# Altium PCB MCU.PcbDoc
Units mil, origin at the board's own origin, x right, y up, seen from the top; angles counter-clockwise.
Board outline 1380 x 2360 mil, 2 copper layers (Top Layer, Bottom Layer); 46 components, 73 nets, 243 pads, 95 vias.
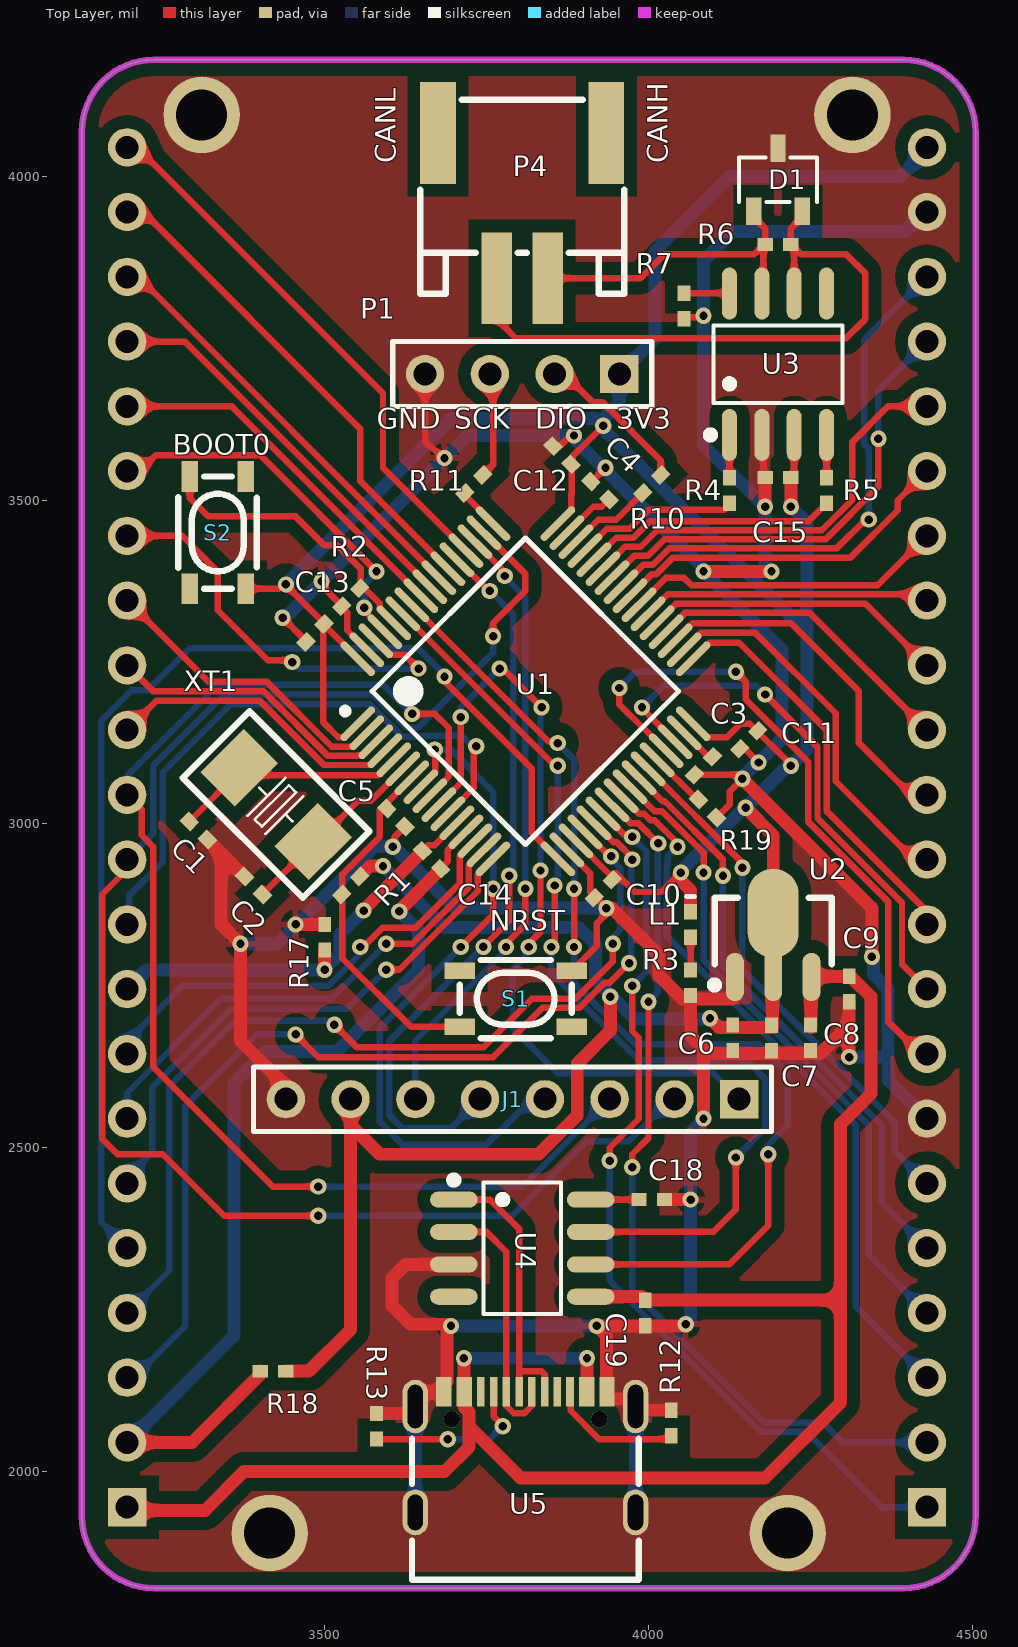
[diagram p0: Top Layer view]
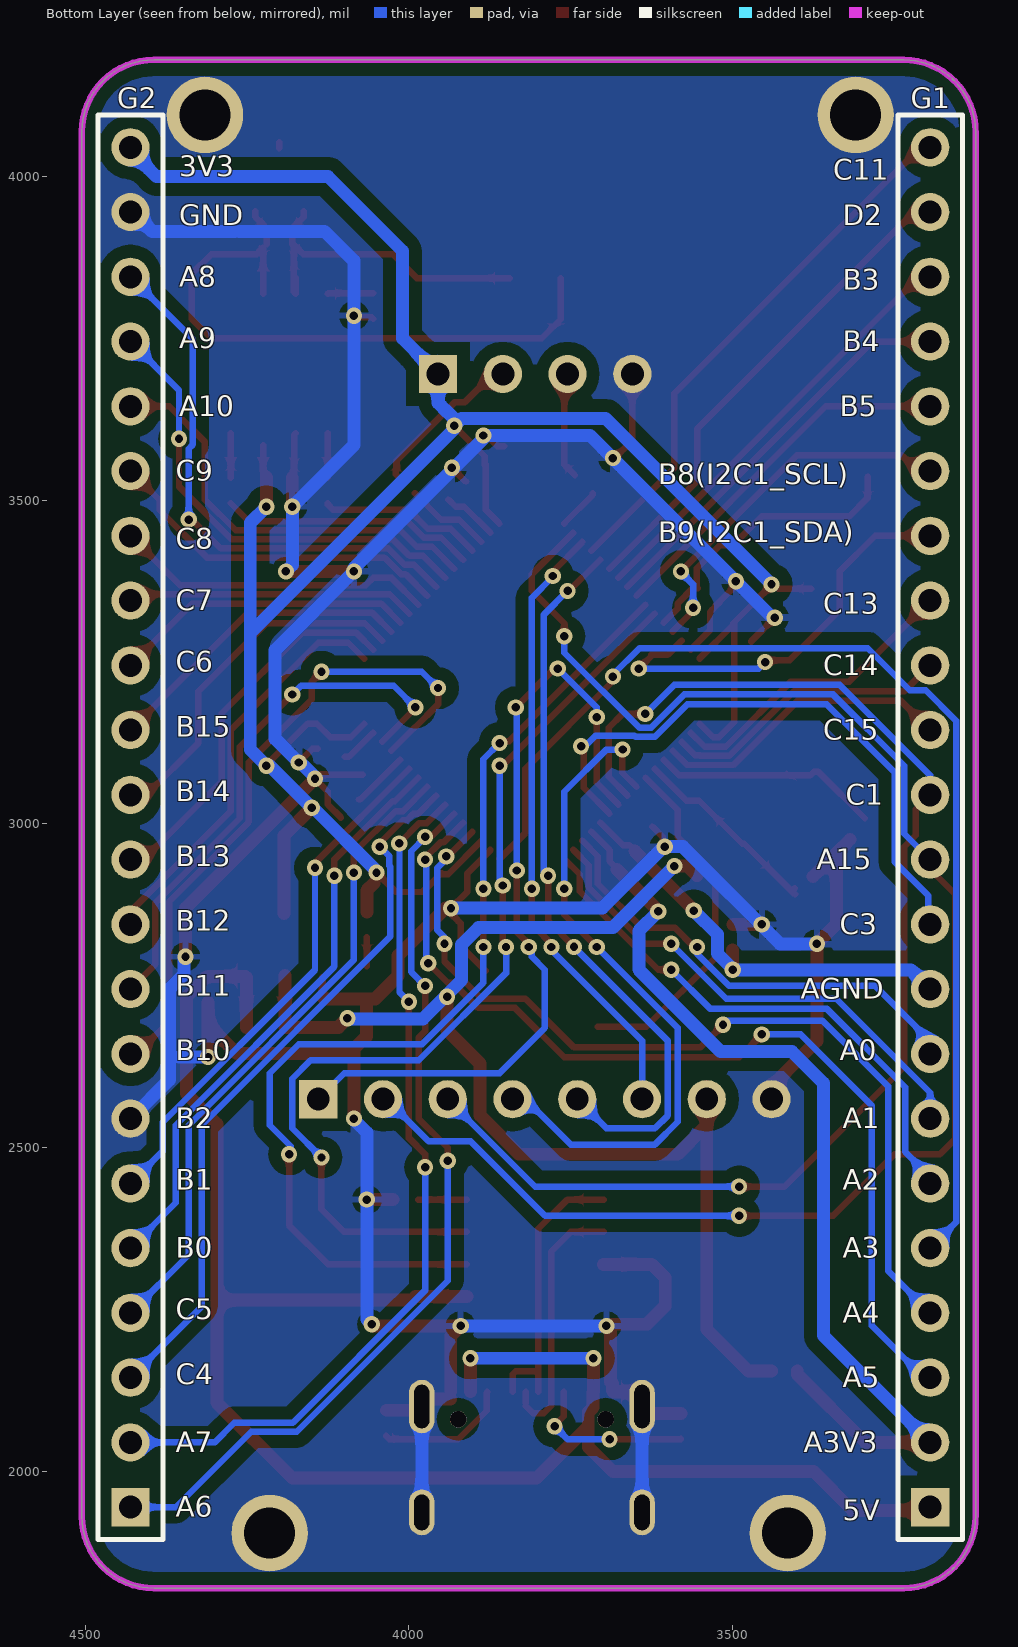
[diagram p1: Bottom Layer view, seen from below]

## Layer stack, top to bottom
Top Solder: solder mask 0.4, Solder Resist, Dk 3.5
Top Layer: signal copper 1.4
Dielectric 1: dielectric 12.6, FR-4, Dk 4.8
Bottom Layer: signal copper 1.4
Bottom Solder: solder mask 0.4, Solder Resist, Dk 3.5

## Board outline
3125,1930.83 ccw(c3235.83,1930.83) 3235.83,1820 4394.17,1820 ccw(c4394.17,1930.83) 4505,1930.83 4505,4069.17 ccw(c4394.17,4069.17) 4394.17,4180 3235.83,4180 ccw(c3235.83,4069.17) 3125,4069.17

## Design rules (kind name [scope] priority, off if disabled: settings)
Clearance [All] p1: gap=20 ignorepadtopadclearanceinfootprint=FALSE
PlaneConnect [All] p1: planeconnectstyle=Direct reliefexpansion=20 reliefentries=4 reliefconductorwidth=10 reliefairgap=10
PolygonConnect [All] p1: thpad.connectstyle=Direct thpad.reliefconductorwidth=10 thpad.reliefentries=4 thpad.polygonreliefangle="90 Angle" thpad.airgapwidth=10 smdpad.connectstyle=Direct smdpad.reliefconductorwidth=10 smdpad.reliefentries=4 smdpad.polygonreliefangle="90 Angle" smdpad.airgapwidth=10 via.connectstyle=Relief via.reliefconductorwidth=10 via.reliefentries=4 via.polygonreliefangle="90 Angle" via.airgapwidth=10
RoutingVias [All] p1: holewidth=13 width=25 viastyle="Through Hole" minholewidth=13 minwidth=25 maxholewidth=28 maxwidth=50
SolderMaskExpansion [All] p1: expansion=4
Width [All] p1: maxlimit=20 minlimit=10 preferedwidth=10 minimp=50.000000 maximp=50.000000 favimp=50.000000
29 further rules are at their usual default settings.

## Components (designator, comment, footprint, x,y, rotation, side; value= is the part's Value field where it differs from the comment)
C1 "" 0402 3305,2990 r315 top value=20pF
C2 "" 0402 3390,2905 r135 top value=20pF
C3 "" 0402 4085,3090 r45 top value=2.2μF
C4 "" 0402 3925,3515 r315 top value=2.2μF
C5 "" 0402 3610,3010 r315 top value=100nF
C6 "" 0402 4130,2670 r90 top value=10μF
C7 "" 0402 4190,2669.68 r90 top value=0.1μF
C8 "" 0402 4250,2670 r90 top value=10μF
C9 "" 0402 4310,2745 r90 top value=0.1μF
C10 "" 0402 3930,2900 r45 top value=0.1μF
C11 "" 0402 4155,3130 r45 top value=0.1μF
C12 "" 0402 3866.39,3569.69 r315 top value=0.1μF
C13 "" 0402 3485,3295 r45 top value=0.1μF
C14 "" 0402 3665,2945 r315 top value=100nF
C15 "" 0402 4200,3535 r0 top value=0.1uF
C18 "" 0402 4005,2420 r0 top value=0.1μF
C19 "" 0402 3995,2245 r270 top value=0.1μF
D1 "TPCDSOT23-SM712" SOT23-3_L2.9-W1.6-P1.90-LS2.8-BR 4200,3995 r270 top
G1 "GPIO1" HDR1X22 3195,1945 r90 bottom (schematic designator P2)
G2 "GPIO2" HDR1X22 4430,1945 r90 bottom (schematic designator P3)
J1 "LCD" HDR1X8 4140,2575 r180 top
L1 "GREEN" 0402-A 4065,2844.68 r270 top (schematic designator LED1)
P1 "SW" HDR1X4 3955,3695 r180 top
P4 "CAN1" FPC-SMD_2P-P2.00_DEALON_PH-2PWB 3805,3955 r180 top
R1 "10K" 0402 3540,2905 r45 top
R2 "10K" 0402 3540,3350 r225 top
R3 "1K" 0402 4065,2755 r90 top
R4 "0R" 0402 4125,3515 r90 top
R5 "0R" 0402 4275,3515 r90 top
R6 "120R" 0402 4200,3895 r180 top
R7 "0R" 0402 4055,3800 r270 top
R10 "22R" 0402 4005,3525 r45 top
R11 "22R" 0402 3730,3525 r45 top
R12 "5.1K" 0402 4035,2075 r270 top
R13 "5.1K" 0402 3580,2070 r270 top
R17 "0R" 0402 3500,2825 r270 top
R18 "0R" 0402 3420,2155 r180 top
R19 "100K" 0402 4091.08,3023.92 r315 top
S1 "NRST" KEY-SMD_4P-L4.2-W3.2-P2.20-LS5.1-TL#1 3795,2730 r0 top
S2 "BOOT0" KEY-SMD_4P-L4.2-W3.2-P2.20-LS5.1-TL#2 3335,3450 r270 top
U1 "STM32F405RGT6" STM-LQFP64_N 3810,3205 r45 top
U2 "AMS1117_3.3" SOT-89-3_L4.5-W2.5-P1.50-LS4.1-BL 4192.63,2812.9 r0 top
U3 "SN65HVD230DR" SN65HVD230DR-SOIC-8_L4.9-W3.9-P1.27-LS6.0-BL 4200,3710 r0 top
U4 "CH340N" CH340N-SOP-8_L4.9-W3.9-P1.27-LS6.0-BL 3805,2345 r270 top
U5 "Type-C 16Pin" USB-C-SMD_TYPE-C16PIN 3810,2030 r0 top
XT1 "8MHz" OSC-SMD_L5.0-W3.2 3425,3030 r315 top

## Footprints (in the part's own frame and the unit in brackets; to place one, negate y for a bottom-side part, rotate by r counter-clockwise, add the part's x,y. Pads: shape width x height; smd on the part's side, far side on the other; paste and mask are expansions set on the pad)
0402 [mm] "Chip Capacitor, Body 1.0x0.5mm, IPC High Density"
  rect 0.6x0.5 smd: 1(-0.5,0) 2(0.5,0)
  body extent -0.55,-0.3 0.55,0.3, height 1.3
0402-A [mm] "Chip Inductor, Body 1.0x0.5mm, IPC High Density"
  rect 0.6x0.5 smd: 1(-0.5,0) 2(0.5,0)
  silkscreen extent -1.1,-0.15 -1.1,0.15, body extent -0.55,-0.3 0.55,0.3, height 0.55
CH340N-SOP-8_L4.9-W3.9-P1.27-LS6.0-BL [mm]
  oval 0.63x1.865 smd: 1(-1.905,-2.682) 2(-0.635,-2.682) 3(0.635,-2.682) 4(1.905,-2.682) 5(1.905,2.682) 6(0.635,2.682) 7(-0.635,2.682) 8(-1.905,2.682)
  silkscreen extent -2.82,-2.83 2.58,1.52
FPC-SMD_2P-P2.00_DEALON_PH-2PWB [mm]
  rect 1.2x3.6 smd: 1(-1,2.85) 2(1,2.85)
  rect 1.4x4 smd: 3(3.3,-2.85) 4(-3.3,-2.85)
  silkscreen extent -4,-4.15 4,3.45
HDR1X4 [mm] "Connector; Header; 4 Position"
  rect 1.5x1.5 hole 0.9: 1(0,0)
  round 1.5 hole 0.9: 2(2.54,0) 3(5.08,0) 4(7.62,0)
  silkscreen extent -1.27,-1.27 8.89,1.27
HDR1X8 [mm] "Connector; Header; 8 Position"
  rect 1.5x1.5 hole 0.9: 1(0,0)
  round 1.5 hole 0.9: 2(2.54,0) 3(5.08,0) 4(7.62,0) 5(10.16,0) 6(12.7,0) 7(15.24,0) 8(17.78,0)
  silkscreen extent -1.27,-1.27 19.05,1.27
HDR1X22 [mm] "Connector; Header; 22 Position"
  rect 1.5x1.5 hole 0.9: 1(0,0)
  round 1.5 hole 0.9: 2(2.54,0) 3(5.08,0) 4(7.62,0) 5(10.16,0) 6(12.7,0) 7(15.24,0) 8(17.78,0) 9(20.32,0) 10(22.86,0) 11(25.4,0) 12(27.94,0) 13(30.48,0) 14(33.02,0) 15(35.56,0) 16(38.1,0) 17(40.64,0) 18(43.18,0) 19(45.72,0) 20(48.26,0) 21(50.8,0) 22(53.34,0)
  silkscreen extent -1.27,-1.27 54.61,1.27
KEY-SMD_4P-L4.2-W3.2-P2.20-LS5.1-TL#1 [mm]
  rect 1.2x0.65 smd: 1(-2.2,1.1) 2(2.2,1.1) 3(-2.2,-1.1) 4(2.2,-1.1)
  silkscreen extent -2.2,-1.55 2.2,1.52
KEY-SMD_4P-L4.2-W3.2-P2.20-LS5.1-TL#2 [mm]
  rect 1.2x0.65 smd: 1(-2.2,-1.1) 2(2.2,1.1) 3(-2.2,1.1) 4(2.2,-1.1)
  silkscreen extent -2.2,-1.55 2.2,1.52
OSC-SMD_L5.0-W3.2 [mm]
  rect 1.9x2.4 smd: 1(-2.05,0) 2(2.05,0)
  silkscreen extent -3.32,-1.85 3.33,1.85
SN65HVD230DR-SOIC-8_L4.9-W3.9-P1.27-LS6.0-BL [mm]
  oval 0.588x2.045 smd: 1(-1.905,-2.773) 2(-0.635,-2.773) 3(0.635,-2.773) 4(1.905,-2.773) 5(1.905,2.773) 6(0.635,2.773) 7(-0.635,2.773) 8(-1.905,2.773)
  silkscreen extent -2.8,-2.92 2.53,1.52
SOT23-3_L2.9-W1.6-P1.90-LS2.8-BR [mm]
  rect 1.07x0.6 smd: 1(1.235,-0.95) 2(1.235,0.95) 3(-1.235,0)
  silkscreen extent -0.88,-1.54 0.88,1.54
SOT-89-3_L4.5-W2.5-P1.50-LS4.1-BL [mm]
  oval 0.7x1.9 smd: 1(-1.501,-1.25) 3(1.501,-1.25)
  oval 0.7x2.1 smd: 2(0,-1.151)
  oval 2x3.5 smd: 2(0,1.25)
  silkscreen extent -2.46,-1.71 2.3,1.85
STM-LQFP64_N [mm] "Thin QFP, 64-Leads, Body 10x10mm, Pitch 0.5mm, IPC Medium Density"
  oval 1.8x0.3 smd: 1(-5.55,3.75) 2(-5.55,3.25) 3(-5.55,2.75) 4(-5.55,2.25) 5(-5.55,1.75) 6(-5.55,1.25) 7(-5.55,0.75) 8(-5.55,0.25) 9(-5.55,-0.25) 10(-5.55,-0.75) 11(-5.55,-1.25) 12(-5.55,-1.75) 13(-5.55,-2.25) 14(-5.55,-2.75) 15(-5.55,-3.25) 16(-5.55,-3.75) 33(5.55,-3.75) 34(5.55,-3.25) 35(5.55,-2.75) 36(5.55,-2.25) 37(5.55,-1.75) 38(5.55,-1.25) 39(5.55,-0.75) 40(5.55,-0.25) 41(5.55,0.25) 42(5.55,0.75) 43(5.55,1.25) 44(5.55,1.75) 45(5.55,2.25) 46(5.55,2.75) 47(5.55,3.25) 48(5.55,3.75)
  oval 0.3x1.8 smd: 17(-3.75,-5.55) 18(-3.25,-5.55) 19(-2.75,-5.55) 20(-2.25,-5.55) 21(-1.75,-5.55) 22(-1.25,-5.55) 23(-0.75,-5.55) 24(-0.25,-5.55) 25(0.25,-5.55) 26(0.75,-5.55) 27(1.25,-5.55) 28(1.75,-5.55) 29(2.25,-5.55) 30(2.75,-5.55) 31(3.25,-5.55) 32(3.75,-5.55) 49(3.75,5.55) 50(3.25,5.55) 51(2.75,5.55) 52(2.25,5.55) 53(1.75,5.55) 54(1.25,5.55) 55(0.75,5.55) 56(0.25,5.55) 57(-0.25,5.55) 58(-0.75,5.55) 59(-1.25,5.55) 60(-1.75,5.55) 61(-2.25,5.55) 62(-2.75,5.55) 63(-3.25,5.55) 64(-3.75,5.55)
  silkscreen extent -5.67,-4.25 4.25,4.57, body extent -5,-5 5,5, height 1.6
USB-C-SMD_TYPE-C16PIN [mm]
  oval 1x2.1 hole 0.6 slot 1.7 at 90 deg: 1(-4.32,1.787) 2(4.32,1.787)
  oval 1x1.8 hole 0.6 slot 1.4 at 90 deg: 3(-4.32,-2.362) 4(4.32,-2.362)
  rect 0.6x1.15 smd: A1B12(-3.2,2.362) A4B9(-2.4,2.362) B1A12(3.2,2.362) B4A9(2.4,2.362)
  rect 0.3x1.15 smd: A5(-1.25,2.362) A6(-0.25,2.362) A7(0.25,2.362) A8(-1.75,2.362) B5(1.75,2.362) B6(0.75,2.362) B7(-0.75,2.362) B8(1.25,2.362)
  round 0.65 hole 0.65 unplated: ""(-2.89,1.288) ""(2.89,1.288)
  silkscreen extent -4.45,-5 4.45,0.52

## Part data
C1 C2 C3 C4 C5 C6 C7 C8 C9 C10 C11 C12 C13 C14 C15 C18 C19: library part "Cap Semi", "Capacitor (Semiconductor SIM Model)", LatestRevisionDate=29-May-2009, LatestRevisionNote="IPC-7351 Footprint Added.", PackageDescription="Chip Capacitor", PackageReference=C1206, Published=8-Jun-2000, Publisher="Altium Limited"
D1: BOM_JLCPCB Part Class="Extended Part", BOM_Manufacturer="TECH PUBLIC", BOM_Manufacturer Part=TPCDSOT23-SM712, BOM_Supplier=LCSC, BOM_Supplier Part=C558433, Contributor=LCSC, spicePre=D, spiceSymbolName=TPCDSOT23-SM712
G1 G2: library part "Header 22", "Header, 22-Pin", LatestRevisionDate=17-Jul-2002, LatestRevisionNote="Re-released for DXP Platform.", Publisher="Altium Limited"
J1: library part "Header 8", "Header, 8-Pin", LatestRevisionDate=17-Jul-2002, LatestRevisionNote="Re-released for DXP Platform.", Publisher="Altium Limited"
L1: library part LED2, "Typical RED, GREEN, YELLOW, AMBER GaAs LED", LatestRevisionDate=17-Jul-2002, LatestRevisionNote="Re-released for DXP Platform.", PackageDescription="SM LED; 2 Flat Leads", PackageReference=3.2X1.6X1.1, PackageVersion=Feb-2002, Published=8-Jun-2000, Publisher="Altium Limited"
P1: library part "Header 4", "Header, 4-Pin", LatestRevisionDate=17-Jul-2002, LatestRevisionNote="Re-released for DXP Platform.", Publisher="Altium Limited"
P4: library part "Header 2", "Header, 2-Pin", LatestRevisionDate=17-Jul-2002, LatestRevisionNote="Re-released for DXP Platform.", Publisher="Altium Limited"
R1 R2 R3 R4 R5 R6 R7 R10 R11 R12 R13 R17 R18 R19: library part Res2, "Resistor", LatestRevisionDate=17-Jul-2002, LatestRevisionNote="Re-released for DXP Platform.", PackageDescription="Axial Device, Thru-Hole; 2 Leads; 0.4 in Pin Spacing", PackageReference=AXIAL-0.4, Published=8-Jun-2000, Publisher="Altium Limited"
S1 S2: library part SW-PB, "Switch", LatestRevisionDate=17-Jul-2002, LatestRevisionNote="Re-released for DXP Platform.", PackageDescription="Switch; 2 Leads", PackageReference=SPST-2, Published=24-Mar-1999, Publisher="Altium Limited"
U1: "ARM Cortex-M4 32-bit MCU+FPU, 210 DMIPS, 1024 kB Flash, 192 kB Internal RAM, 51 I/Os, 64-pin LQFP, -40 to 85 degC, Tray", I/Os (High Current)=51, Manufacturer=STMicroelectronics, Operating Frequency(F) (Processor speed) (MHz)=168, Supplier Part Number 1=497-11767-ND, Supply Voltage(Vcc) max (V)=3.6, Supply Voltage(Vcc) min (V)=1.8, ComponentLink1Description="Manufacturer URL", ComponentLink1URL=http://www.st.com/web/en/home.html, ComponentLink2Description=Datasheet, ComponentLink2URL=http://www.st.com/st-web-ui/static/active/en/resource/technical/document/datasheet/DM00037051.pdf, ComponentLink3Description="Package Specification", ComponentLink3URL=http://www.st.com/st-web-ui/static/active/en/resource/technical/document/datasheet/DM00037051.pdf, Core="ARM Cortex-M4", D/A Converter=2x12-bit, DatasheetVersion="Rev. 4", FLASH Size (Prog) (kB)=1024, Internal RAM Size (kB)=192, Mounting Technology="Surface Mount", PackageDescription="64-Pin Low Profile Quad Flat Package, 10 x 10 mm Body, 0.5 mm Pitch", PackageReference=LQFP64, PackageVersion="Rev. 4, 06/2013", Packing=Tray, PartNumber=STM32F405RGT6, Supplier 1=Digi-Key, Supplier 2=Farnell, Supplier 3=Newark, Supplier 4=Mouser, Supplier Part Number 2=2064363, Supplier Part Number 3=73T2329, Supplier Part Number 4=511-STM32F405RGT6
U2: library part "AMS1117_3.3 SOT-89"
XT1: library part XTAL, "Crystal Oscillator", LatestRevisionDate=17-Jul-2002, LatestRevisionNote="Re-released for DXP Platform.", PackageDescription="Crystal, Thru-Hole; 2 Leads; Body 3.1 x 8.2 mm (Dia.xH)", PackageReference=R38, Published=8-Jun-2000, Publisher="Altium Limited"

## Free pads (board coordinates)
  round 118.11 hole 78.74: 6(3415,1905) 7(4215,1905) 8(4315,4095) 9(3310,4095)

## Via types
v1: diameter 25, hole 13, Top Layer to Bottom Layer, 95 vias

## Nets (pads, with @x,y where several pads share a name; then routed paths per layer and width w, separated by ;. In a path a pad name is that pad's centre, name@x,y a point inside that pad or via, vN(x,y) a via of type N, cw(c..) or ccw(c..) an arc to the next point about the centre after c; other vN are vias at no path point)
3.3V: C6.2 C7.2 C10.2 C11.2 C12.2 C13.2 C15.2 G2.22 J1.7 L1.1 P1.1 R1.2 R18.1 S2.2 U1.1 U1.19 U1.32 U1.48 U1.64 U2.2 U3.3 | length 5820.2
  Top Layer w10: S2.2 3429.33,3363.39 ; v1(3440,3370) 3440,3368.92 3498.92,3310 C13.2 ; U1.1 3530.22,3134.01 3520.99,3134.01 3497.53,3157.47 3497.53,3307.53 C13.2 ; U1.64 3551.1,3255.6 3498.92,3307.78 C13.2 ; R1.2@3555.08,2920 R1.2@3555.08,2920.08 ; U1.48 3880.99,3484.78 3880.99,3509.01 3881.39,3509.41 3881.39,3555.77 3882.78,3554.38 3882.78,3567.78 3893.5,3578.5 3893.91,3578.5 3930,3614.59 v1(3930,3615) ; U1.19 3939.36,2922.53 3947.53,2922.53 3948.92,2923.92 3950,2923.92 3978.92,2895 4020,2895 v1(4050,2925) ; U1.32 4089.78,3134.01 4121.22,3134.01 4142.21,3155 4156.42,3155 4220,3091.42 v1(4220,3090) ; U2.2@4191.31,2766.29 U2.2@4192.63,2767.6 ; v1@4219.84,3490.16 v1(4220,3490) ; C15.2@4219.84,3534.84 C15.2 4225,3535 U3.3@4225,3585
  Top Layer w20: R18.1 3475.48,2155 3540,2219.52 J1.7 ; J1.7@3535,2580 J1.7 ; J1.7@3540,2595 J1.7 ; 3545,2530 3585,2490 3830,2490 3890,2550 3890,2630 3941,2681 v1(3941,2733.34) ; R1.2@3555.08,2920.08 3570,2935 v1(3590,2935) ; 4053.5,2909.02 4065,2897.52 L1.1 ; v1(4095,2700) 4109,2686 4191.31,2686 U2.2@4191.31,2766.29 ; v1(4150,3025) 4192.63,2982.37 U2.2@4192.63,2862.1 ; v1@4219.84,3490.16 C15.2@4219.84,3534.84
  Bottom Layer w10: v1@4215,3090 v1(4220,3090)
  Bottom Layer w20: v1(3440,3370) 3696.5,3626.5 3918.5,3626.5 v1(3930,3615) ; v1(3590,2935) 3685,2840 3892.48,2840 3918.5,2813.98 3918.5,2759.02 3978.52,2699 4094,2699 v1(4095,2700) ; 3949.56,3645.44 3940.88,3636.75 ; v1@4053.5,2930.98 4146.57,3024.04 4149.04,3024.04 v1(4150,3025) v1@4215,3090 ; v1(4220,3090) 4245,3115 4245,3295 ; v1(4220,3490) 4245,3465 4245,3295 ; G2.22@4430,4040 4390,4000 4125,4000 4010,3885 4010,3750 P1.1 3955,3650 3941.31,3636.31 3940.88,3636.75 ; v1(3930,3615) 3930,3625.88 3940.88,3636.75 ; v1(3930,3615) 3930,3610 4245,3295
+5: C8.2 C9.2 C19.1 G1.1 U2.3 U4.5 U5.A4B9 U5.B4A9 | length 2826.2
  Top Layer w10: v1(3715,2175) v1@3715.26,2174.74 ; U5.A4B9@3715.26,2123.27 U5.A4B9 ; U5.B4A9 U5.B4A9@3904.74,2123.27 ; v1@3904.74,2174.74 v1(3905,2175) ; C19.1@3989.69,2270 C19.1 ; C8.2@4250,2684.69 C8.2@4250.86,2685.55 ; U2.3@4250.86,2762.84 U2.3 U2.3@4252.71,2764.69 ; C9.2@4310,2762.72 C9.2
  Top Layer w20: G1.1@3195,1940 3315,1940 3375,2000 3685,2000 3723.01,2038.02 3723.01,2069.61 ; U5.A4B9@3715.26,2123.27 v1@3715.26,2174.74 ; U5.A4B9 3715.51,2099.31 3723.01,2091.81 3723.01,2069.61 ; U5.B4A9@3904.74,2123.27 v1@3904.74,2174.74 ; U4.5 C19.1@3989.69,2270 ; C19.1 4296.5,2264.68 ; C8.2@4250.86,2685.55 U2.3@4250.86,2762.84 ; U2.3@4252.71,2764.69 C9.2 ; C9.2@4310,2762.72 4314.05,2762.72 4343.5,2733.27 4343.5,2583.5 4296.5,2536.5 4296.5,2264.68 ; 3723.01,2069.61 3802.63,1990 4180,1990 4296.5,2106.5 4296.5,2264.68
  Bottom Layer w20: v1(3715,2175) v1(3905,2175)
A3.3V: C14.2 G1.2 R18.2 U1.13 | length 1502.5
  Top Layer w10: v1(3615,2865) v1@3615,2866.08 ; C14.2@3678.92,2930 C14.2 3690,2942.16 3690,2959.73 U1.13
  Top Layer w20: G1.2 3295,2045 3400.31,2150.31 R18.2 ; v1@3615,2866.08 C14.2@3678.92,2930
  Bottom Layer w20: G1.2 3360,2210 3360,2600 3408.5,2648.5 3518.5,2648.5 3645,2775 3645,2835 v1(3615,2865)
ADC1_IN0: G1.8 U1.14 | length 715.9
  Top Layer w10: v1(3555,2810) 3559.59,2810 3589.59,2840 3640.41,2840 3708.23,2907.83 3708.23,2950.12 U1.14
  Bottom Layer w10: G1.8 3195,2665 3280,2750 3505.41,2750 3555,2799.59 v1(3555,2810)
ADC1_IN1: G1.7 U1.15 | length 766.4
  Top Layer w10: v1(3595,2815) 3635.2,2815 3722.28,2902.08 3722.28,2936.33 U1.15
  Bottom Layer w10: G1.7 3195,2585 3340,2730 3510,2730 v1(3595,2815)
ADC1_IN2: G1.6 U1.16 | length 852.2
  Top Layer w10: v1(3595,2775) 3615,2775 3736.28,2896.28 3736.28,2922.49 U1.16
  Bottom Layer w10: G1.6 3195,2455 3233.53,2493.53 3233.53,2593.53 3355,2715 3535,2715 v1(3595,2775)
AGND: C14.1 G1.9 R17.2 U1.12 | length 665.4
  Top Layer w10: v1(3499.8,2774.8) v1@3500,2775 ; v1(3560,2866.26) v1@3560,2867.05 ; C14.1@3651.08,2958.13 C14.1 3659.69,2967.53 3669.96,2967.53 U1.12
  Top Layer w20: v1@3500,2775 R17.2 ; v1@3560,2867.05 C14.1@3651.08,2958.13
  Bottom Layer w20: G1.9 3224.8,2774.8 v1(3499.8,2774.8) 3499.8,2776.15 3523.5,2799.85 3523.5,2829.76 v1(3560,2866.26)
BLK: J1.1 U1.10 | length 1247.5
  Top Layer w10: U1.10 3676.37,3030.11 3710,3063.73 v1(3710,3165) ; v1(3770,3240) 3775,3240 v1(3835,3180) ; v1@3810,2810 3833.25,2833.25 v1(3833.25,2928.25)
  Bottom Layer w10: v1(3710,3165) 3710,3180 v1(3770,3240) ; v1@3810,2810 3810,2795 3790,2775 3790,2685 3860,2615 4100,2615 J1.1 ; v1(3833.25,2928.25) v1@3833.25,3180
  other v1: 3815,2810
CAN1_RX: R5.1 U1.44 | length 395.3
  Top Layer w10: U1.44 3916.28,3408.22 3950.05,3442 3976.8,3442 4002.3,3467.5 4247.18,3467.5 R5.1
CAN1_TX: R4.1 U1.45 | length 254.6
  Top Layer w10: U1.45 3935.73,3456 3971,3456 4000,3485 4116.65,3485 4125,3493.35 R4.1
CAN_H: D1.1 P4.1 R6.2 U3.7 | length 519.1
  Top Layer w10: P4.1 3987.63,3842.8 4024.84,3880 4163.35,3880 4178.35,3895 R6.2 ; D1.1 4162.6,3937.13 4169.41,3930.32 4169.84,3930.32 4180.31,3919.84 R6.2 ; U3.7@4175,3843.7 U3.7 4177.52,3821.67 4177.52,3892.2 R6.2
CAN_L: D1.2 P4.2 R6.1 U3.6 | length 983.7
  Top Layer w10: P4.2 3765.63,3779.37 3795,3750 4305,3750 4335,3780 4335,3850 4305,3880 4235.16,3880 4225,3890.16 U3.6 ; R6.1 4219.69,3919.68 4237.4,3937.4 D1.2
CS: G1.11 J1.2 U1.50 | length 2510
  Top Layer w10: G1.11 3210,2945 3156.47,2891.47 3156.47,2513.53 3180,2490 3250,2490 3345,2395 v1(3490,2395) ; U1.50 3810,3385.95 3810,3360 3760,3310 v1(3760,3290)
  Bottom Layer w10: G1.11 3235,2985 3235,3090 3345,3200 3574.59,3200 3626.09,3148.5 3643.91,3148.5 3760,3264.59 v1(3760,3290) ; v1(3490,2395) 3789.8,2395 3904.8,2510 3969.59,2510 4034.59,2575 J1.2
DC: G1.12 J1.3 U1.9 | length 2003.1
  Top Layer w10: G1.12 3217.5,3022.5 3217.5,2982.5 3235,2965 3235,2625 3420,2440 v1(3490,2440) ; v1(3635,3170) 3670,3170 3691.5,3148.5 3691.5,3073.07 3662.45,3044.02 U1.9
  Bottom Layer w10: G1.12 3195,3075 3335,3215 3590,3215 v1(3635,3170) ; v1(3490,2440) 3805,2440 J1.3
GND: C1.2 C2.2 C3.1 C4.1 C5.2 C6.1 C7.1 C8.1 C9.1 C10.1 C11.1 C12.1 C13.1 C15.1 C18.2 C19.2 D1.3 G2.7 G2.21 J1.8 P1.4 pad.6 pad.7 pad.8 pad.9 R2.2 R3.1 R7.2 R12.1 R13.1 R17.1 R19.2 S1.2 U1.18 U1.63 U2.1 U3.2 U4.3 U5.1 U5.2 U5.3 U5.4 U5.A1B12 U5.B1A12 | length 7758.5
  Top Layer w10: v1(3435,3318.58) 3471.08,3282.5 C13.1 ; v1(3455,2845) v1@3455.16,2844.84 ; v1(3495,3375) 3491.42,3375 3490,3373.58 3491.79,3371.79 R2.2@3526.08,3337.5 ; R17.1@3499.84,2844.84 R17.1 ; R2.2@3521.08,3341.08 R2.2 ; R2.2@3521.79,3341.79 R2.2@3526.08,3337.5 ; R2.2@3530,3332.16 R2.2 ; R2.2@3531.08,3331.08 3535,3327.16 3535,3299.05 U1.63 ; v1(3605,2965) 3607.87,2967.87 3607.87,2980.03 C5.2 ; U5.1@3629.24,2089.68 U5.1 3639.92,2109.44 U5.1@3653.49,2123.01 ; P1.4 3655,3590 v1(3685,3565) ; U5.A1B12 U5.A1B12@3684.67,2123.66 ; v1@3691.15,2227.5 v1@3695,2223.65 ; C12.1 3863.27,3583.61 3879.66,3600 v1(3885,3600) ; U1.18 3874.03,2959.53 3910,2923.56 3910,2895 v1@3928.21,2876.79 ; S1.2 3920,2811.69 3920,2846.42 v1@3943.58,2870 ; C4.1 3912.5,3528.92 v1(3933.58,3550) ; U5.B1A12@3935.33,2123.66 U5.B1A12 U5.B1A12@3935.98,2112.18 ; U5.2@3968.27,2112.18 U5.2 U5.2@3985.77,2094.68 ; R7.2 4057.34,3782.66 4082.66,3782.66 v1(4085,3785) ; C3.1 4138.92,3076.08 v1(4145,3070) 4125.28,3050.28 4125.28,3030.28 R19.2 ; U2.1@4133.53,2733.53 U2.1 ; C11.1 4148.92,3116.08 v1(4170,3095) ; U3.2@4175,3603.5 4177.37,3601.13 4177.37,3537.95 C15.1 C15.1@4180.16,3534.84 ; v1(4180,3490) v1@4180.16,3490.16 ; D1.3 D1.3@4200,4052.88 ; R2.2 R2.2@3526.08,3337.5
  Top Layer w20: C1.2 3340,2955 ; C2.2 3340,2955 ; J1.8@3440,2595 3370,2665 v1(3370,2815) 3340,2845 3340,2955 ; v1@3455.16,2844.84 R17.1@3499.84,2844.84 ; R13.1 U5.1@3629.24,2089.68 ; U5.1@3653.49,2123.01 U5.A1B12 ; U5.A1B12@3684.67,2123.66 3685.82,2124.82 3685.82,2135.65 3688.5,2138.32 3688.5,2217.15 v1@3695,2223.65 ; v1@3691.15,2227.5 3632.5,2227.5 3604.14,2255.86 3604.14,2299.14 3625,2320 U4.3 ; U5.B1A12@3935.33,2123.66 3935.33,2209.67 v1(3920,2225) 4055,2225 v1(4057.5,2227.5) ; U5.B1A12@3935.98,2112.18 U5.2@3968.27,2112.18 ; v1@3943.58,2870 4016.5,2797.08 4016.5,2765.47 4051.97,2730 R3.1@4065.16,2730 ; U5.2@3985.77,2094.68 R12.1 ; C18.2 v1(4065,2420) ; v1(4085,2545) 4085,2645.32 4085,2652.52 ; v1(4085,3390) v1(4190,3390) ; U2.1@4133.53,2733.53 4130,2730 R3.1@4065.16,2730 ; v1(4145,3070) 4345,2870 v1(4345,2795) ; v1@4180.16,3490.16 C15.1@4180.16,3534.84 ; v1(4310,2640) 4310,2690 ; C9.1 4310,2690 ; R3.1@4065.16,2730 4065.16,2697.65 4065.5,2697.31 4065.5,2672.02 4085,2652.52 ; 4085,2652.52 4092.21,2645.32 4265.31,2645.32 4310,2690
  Bottom Layer w10: v1(3695,2225) v1@3705,2225 ; U5.2@3980.08,2097.29 U5.2 ; v1@4162.5,3090 4167.5,3095 v1(4170,3095) ; 4262.5,3915 4268.75,3915 ; v1(4345,2795) v1@4347.5,2792.5 ; G2.21@4421.29,3940 G2.21@4430,3940
  Bottom Layer w20: v1(3370,2815) 3426.99,2815 3576.99,2965 v1(3605,2965) 3606.42,2965 3700.92,2870.5 3934.5,2870.5 v1(3935,2870) ; v1(3435,3318.58) 3438.58,3318.58 v1(3495,3375) v1(3685,3565) 3720,3600 v1(3885,3600) 3885,3595 4085,3395 v1(4085,3390) 4206.5,3268.5 4206.5,3131.5 v1(4170,3095) ; U5.3 U5.1 ; v1@3705,2225 v1(3920,2225) ; U5.4 U5.2 ; v1(4057.5,2227.5) 4065,2235 v1(4065,2420) 4065,2523.65 4085,2543.65 v1(4085,2545) ; v1@4143.75,3071.25 v1@4162.5,3090 ; v1(4190,3390) 4180,3400 v1(4180,3490) 4085,3585 v1(4085,3785) 4085,3870 4130,3915 4262.5,3915 ; 4268.75,3915 4396.29,3915 G2.21@4421.29,3940 ; v1@4317.5,2640 4355,2640 ; v1@4347.5,2792.5 4347.5,2767.5 4370,2745 4370,2605 G2.7
GPIO_2: G1.15 U1.2 | length 472.6
  Top Layer w10: G1.15 3320,3220 3410,3220 3510.89,3119.11 3543.15,3119.11 U1.2
GPIO_3: G1.14 U1.3 | length 451
  Top Layer w10: G1.14 3234.69,3205.31 3404.89,3205.31 3505.1,3105.11 3550.23,3105.11 3550.95,3105.83 3557.71,3105.83 U1.3
GPIO_4: G1.13 U1.4 | length 466.6
  Top Layer w10: G1.13 3240,3190 3400,3190 3498.89,3091.11 3570.34,3091.11 3592.37,3113.13 U1.4
GPIO_11: G1.10 U1.11 | length 944.3
  Top Layer w10: U1.11 3690.29,3016.19 3730,3055.89 3730,3124 v1(3734,3120)
  Bottom Layer w10: G1.10 3197.89,2847.89 3197.89,2889.53 3250,2941.64 3250,3080 3355,3185 3569.8,3185 3620.3,3134.5 3649.7,3134.5 3651.7,3136.5 3711.5,3136.5 3728,3120 v1(3734,3120)
GPIO_17: G1.5 U1.17 | length 1781.3
  Top Layer w10: v1(3685,3227.7) 3685,3220.41 3820,3085.41 3820,2986.21 U1.17
  Bottom Layer w10: G1.5 3155,2385 3155,3159.49 3201.99,3206.47 3226.47,3206.47 3291.5,3271.5 3643.91,3271.5 3685,3230.41 v1(3685,3227.7)
GPIO_20: G1.4 U1.20 | length 1405.3
  Top Layer w10: v1(3515,2690) 3550,2655 3745,2655 3820,2730 3887.45,2730 3945,2787.55 v1(3945,2815) ; U1.20 3939.73,2950 v1(3942.29,2950)
  Bottom Layer w10: G1.4 3260,2310 3260,2595 3361.5,2696.5 3508.5,2696.5 v1(3515,2690) ; v1(3942.29,2950) 3942.29,2945.94 3956.5,2931.74 3956.5,2836.5 3945,2825 v1(3945,2815)
GPIO_21: G1.3 U1.21 | length 1514.6
  Top Layer w10: v1(3455,2675) 3490,2640 3760,2640 3836,2716 3893.25,2716 3919.5,2742.25 3932.09,2754.84 3939.84,2754.84 v1(3970,2785) ; U1.21 3916.28,3001.78 3946.55,2971.5 3951.2,2971.5 3975,2947.7 v1(3975,2945)
  Bottom Layer w10: G1.3 3205,2145 3285,2225 3285,2565 3395,2675 v1(3455,2675) ; v1(3970,2785) 3973.12,2788.12 3973.12,2943.12 v1(3975,2945)
GPIO_22: G2.1 U1.22 | length 1420.8
  Top Layer w10: U1.22 3930.2,3015.7 3963.02,2982.87 3972.13,2982.87 v1(3975,2980) ; v1(3940,2480) 3940,2500 3985,2545 3985,2670 3975,2680 v1(3975,2750)
  Bottom Layer w10: v1(3940,2480) 3940,2294.8 4173.3,2061.5 4243.5,2061.5 4360,1945 G2.1 ; v1(3975,2750) 3996.5,2771.5 3996.5,2958.09 3975,2979.59 v1(3975,2980)
GPIO_23: G2.2 U1.23 | length 1355.5
  Top Layer w10: U1.23 3944.12,3029.62 3972.23,3001.5 3983.91,3001.5 4015,2970.41 v1(4015,2970) ; v1(3975,2470) 3975,2490 4000,2515 v1(4000,2725.5)
  Bottom Layer w10: v1(3975,2470) 3975,2279.59 4179.09,2075.5 4269.5,2075.5 4300,2045 G2.2 ; v1(4000,2725.5) 4014.5,2740 4014.5,2969.5 v1(4015,2970)
GPIO_24: G2.3 U1.24 | length 1155.4
  Top Layer w10: U1.24 3958.04,3043.53 3986.07,3015.5 3993.62,3015.5 4003.12,3006 4009.41,3006 4042.13,2973.28 4042.13,2967.87 v1(4045,2965)
  Bottom Layer w10: v1(4045,2965) 4030,2950 4030,2935.41 4028.5,2933.91 4028.5,2826.5 4320,2535 4320,2255 G2.3 ; G2.3@4405,2145 G2.3 ; G2.3@4420,2135 G2.3
GPIO_25: G2.4 U1.25 | length 1009.1
  Top Layer w10: U1.25 4008.92,3020 4020.41,3020 4085,2955.41 v1(4085,2925)
  Bottom Layer w10: v1(4085,2925) 4085,2790 4340,2535 4340,2335 G2.4
GPIO_26: G2.5 U1.26 | length 912.6
  Top Layer w10: U1.26 4021.76,3035 4025.2,3035 4115,2945.2 v1(4115,2920)
  Bottom Layer w10: v1(4115,2920) 4115,2780 4360,2535 4360,2415 G2.5
GPIO_27: G2.6 U1.27 | length 818.8
  Top Layer w10: U1.27 3999.51,3085.29 4145,2939.8 v1(4145,2932.4)
  Bottom Layer w10: v1(4145,2932.4) 4145,2774.59 4380,2539.59 4380,2495 G2.6
GPIO_29: G2.8 U1.29 | length 1035.6
  Top Layer w10: v1(3955,3210) 3955,3184.59 3991.09,3148.5 3991.77,3148.5 U1.29 ; v1(4135,3235) 4150,3220 4150,3192.27 4247,3095.27 4247,3003.2 4370,2880.2 4370,2695 4420,2645 G2.8
  Bottom Layer w10: v1(3955,3210) 3980,3235 v1(4135,3235)
GPIO_30: G2.9 U1.30 | length 842.1
  Top Layer w10: v1(3990,3180) 3990,3178.6 4041.06,3127.54 U1.30 ; v1(4180,3200) 4261,3119 4261,3009 4391.47,2878.53 4391.47,2783.53 G2.9
  Bottom Layer w10: v1(3990,3180) 4023.5,3213.5 4166.5,3213.5 v1(4180,3200)
GPIO_33: G2.10 U1.33 | length 636.5
  Top Layer w10: U1.33 4093.79,3280 4140,3280 4275,3145 4275,3020 4430,2865 G2.10
GPIO_37: G2.14 U1.37 | length 468.2
  Top Layer w10: U1.37 4042.44,3340 4335,3340 G2.14
GPIO_38: G2.15 U1.38 | length 447.8
  Top Layer w10: U1.38 4029.6,3355 4060.2,3355 4060.7,3354.5 4359.3,3354.5 4359.8,3355 4420,3355 G2.15
GPIO_39: G2.16 U1.39 | length 498.2
  Top Layer w10: U1.39 4026.76,3380 4055,3380 4066.5,3368.5 4353.5,3368.5 G2.16
GPIO_40: G2.17 U1.40 | length 547.3
  Top Layer w10: U1.40 3971.96,3352.55 4005.41,3386 4012.3,3386 4037.8,3411.5 4311.91,3411.5 4384.76,3484.35 4384.76,3499.76 G2.17
GPIO_52: G1.22 U1.52 | length 848.3
  Top Layer w10: G1.22 3210,4045 3590,3665 3590,3550.27 U1.52
GPIO_54: G1.21 U1.54 | length 770.5
  Top Layer w10: G1.21 3220,3945 3555,3610 3555,3529.6 U1.54
I2C1_SCL: G1.17 U1.61 | length 583.4
  Top Layer w10: G1.17 3215,3545 3239.24,3569.24 3400.76,3569.24 v1(3580,3390) ; v1(3561.13,3333.87) 3564,3331 3564,3326.22 3592.86,3297.36 U1.61
  Bottom Layer w10: v1(3561.13,3333.87) 3561.13,3369.98 3580,3388.86 v1(3580,3390)
I2C1_SDA: G1.16 U1.62 | length 656.1
  Top Layer w10: G1.16 3280,3445 3335,3390 3335,3330 3412.13,3252.87 3447.13,3252.87 v1(3450,3250) ; U1.62 3600.8,3261.08 3626.08,3261.08 3625,3260 v1(3645,3240)
  Bottom Layer w10: v1(3450,3250) 3460,3240 v1(3645,3240)
NetC1_1: C1.1 U1.5 XT1.1 | length 353.1
  Top Layer w10: C1.1@3296.08,3008.92 3368.2,3081.04 3373.96,3081.04 3380,3075 3582.56,3075 U1.5
NetC2_1: C2.1 U1.6 XT1.2 | length 299.3
  Top Layer w10: C2.1@3403.74,2891.26 3482.12,2969.64 3485.36,2969.64 3551.71,3036 3571.4,3036 U1.6 ; C2.1@3403.92,2901.08 C2.1@3405.31,2899.69
NetC3_2: C3.2 U1.31 | length 59.6
  Top Layer w10: U1.31 4054.98,3140.49 4055.95,3140.49 4092.52,3103.92 C3.2
NetC4_2: C4.2 U1.47 | length 86.1
  Top Layer w10: U1.47 3874.52,3449.98 3914.54,3490 3927.84,3490 C4.2
NetC5_1: C5.1 R1.1 S1.3 U1.7 | length 548.2
  Top Layer w10: U1.7 3585,3021.76 3585,2980 3527.16,2922.16 3527.16,2792.84 3633.3,2686.7 S1.3
NetC18_1: C18.1 U4.8 | length 74.7
  Top Layer w10: U4.8 C18.1
NetLED1_2: L1.2 R3.2 | length 45
  Top Layer w10: R3.2@4065,2780 4065,2790 L1.2
NetP1_2: P1.2 R10.2 | length 257.9
  Top Layer w10: P1.2@3855,3710 P1.2 3870,3695 3913.5,3651.5 3928.91,3651.5 4018.92,3561.49 4018.92,3548.55 4020.31,3547.16 4020.31,3540.31 R10.2
NetP1_3: P1.3 R11.2 | length 184.8
  Top Layer w10: R11.2 3760,3555 3760,3690 P1.3 P1.3@3755,3710 ; P1.3@3760,3705 P1.3@3760,3710
NetR2_1: R2.1 S2.1 U1.60 | length 452.5
  Top Layer w10: S2.1 3291.7,3503.3 3320,3475 3455,3475 3499.83,3430.17 3519.83,3430.17 3555.31,3394.69 3555.31,3365.17 R2.1@3554.42,3364.28 ; R2.1@3553.92,3363.78 R2.1@3554.42,3364.28 ; U1.60 3584.91,3332.65 3584.91,3340.49 3561.13,3364.28 R2.1@3554.42,3364.28
NetR4_2: R4.2 U3.1 | length 68.8
  Top Layer w10: R4.2 U3.1@4125,3603.5
NetR5_2: R5.2 U3.4 | length 68.8
  Top Layer w10: R5.2 U3.4@4275,3603.5
NetR7_1: R7.1 U3.8 | length 70.2
  Top Layer w10: R7.1 4124.47,3819.68 U3.8
NetR12_2: R12.2 U5.B5 | length 205.3
  Top Layer w10: U5.B5 3879.8,2122.11 3879.8,2093.87 3923.63,2050.04 4030.16,2050.04 4035,2054.88 R12.2
NetR13_2: R13.2 U5.A5 | length 262.3
  Top Layer w10: R13.2 3580.32,2050 v1(3690,2050) ; U5.A5 3760.78,2085.37 3775,2071.16 v1(3775,2070)
  Bottom Layer w10: v1(3690,2050) 3755,2050 v1(3775,2070)
NetR19_1: R19.1 U1.28 | length 89.4
  Top Layer w10: U1.28 4013.71,3099.21 4075.09,3037.84 R19.1
RES: J1.4 U1.8 | length 1073
  Top Layer w10: U1.8 3670.4,3079.32 3670.4,3114.6 v1(3670,3115) ; v1(3710,2810) 3760,2860 v1(3760,2900)
  Bottom Layer w10: v1(3670,3115) 3695,3115 3760,3050 v1(3760,2900) ; v1(3710,2810) 3585,2685 3585,2540 3620,2505 3750,2505 J1.4@3840,2595
SPI1_MISO: G1.19 U1.56 | length 624.2
  Top Layer w10: G1.19 3283.92,3745 U1.56
SPI1_MOSI: G1.18 U1.57 | length 574.7
  Top Layer w10: G1.18 3356.08,3645 U1.57
SPI1_SCK: G1.20 U1.55 | length 673.8
  Top Layer w10: G1.20 3204.39,3835.61 3221.14,3835.61 U1.55
SPI3_MOSI: J1.5 U1.53 | length 1142.1
  Top Layer w10: U1.53 3704.7,3408.22 3752.93,3360 v1(3755,3360) ; v1(3745,2810.2) 3745,2810.41 3785,2850.41 v1(3785,2920)
  Bottom Layer w10: J1.5 3695,2530 3620,2530 3600,2550 3600,2665 3745,2810 v1(3745,2810.2) ; v1(3755,3360) 3791.5,3323.5 3791.5,2926.5 v1(3785,2920)
SPI3_SCK: J1.6 U1.51 | length 963.8
  Top Layer w10: U1.51 3732.05,3435.57 3777.97,3389.65 v1(3777.97,3382.97) ; v1@3775,2810 3810,2845 v1(3810,2900)
  Bottom Layer w10: J1.6 3640,2665.41 3775,2800.41 v1@3775,2810 ; v1(3777.97,3382.97) 3777.97,3381.63 3810,3349.59 v1(3810,2900)
  other v1: 3780,2810
SWCLK: R11.1 U1.49 | length 65.3
  Top Layer w10: R11.1 3716.08,3508.2 3759.89,3464.39 U1.49
SWDIO: R10.1 U1.46 | length 134.2
  Top Layer w10: U1.46 3888.44,3436.06 3922.38,3470 3950,3470 R10.1
TIM1_CH1: G2.20 U1.41 | length 843
  Top Layer w10: U1.41 3958.04,3366.47 3991.57,3400 4006.5,3400 4032,3425.5 4290.5,3425.5 4335,3470 v1(4340,3470)
  Bottom Layer w10: v1(4340,3470) 4340,3579.59 4333.5,3586.09 4333.5,3748.5 G2.20
TIM1_CH1N: G2.11 U1.34 | length 592.3
  Top Layer w10: U1.34 4080.95,3295 4165,3295 4289,3171 4289,3066 4410,2945 G2.11
TIM1_CH2: G2.19 U1.42 | length 724.6
  Top Layer w10: U1.42 3944.12,3380.38 3977.73,3414 3999,3414 4024.5,3439.5 4273.37,3439.5 4355,3521.13 v1(4355,3595)
  Bottom Layer w10: v1(4355,3595) 4355,3670 G2.19
TIM1_CH2N: G2.12 U1.35 | length 556.8
  Top Layer w10: U1.35 4068.11,3310 4220,3310 4325,3205 4325,3125 4405,3045 G2.12
TIM1_CH3: G2.18 U1.43 | length 656.3
  Top Layer w10: U1.43 3930.2,3394.3 3963.89,3428 3988,3428 4013.5,3453.5 4267.57,3453.5 4315,3500.93 4315,3590 4370,3645 G2.18
TIM1_CH3N: G2.13 U1.36 | length 489.9
  Top Layer w10: U1.36 4056.27,3326 4249,3326 G2.13
USART1_RX: U1.59 U4.7 | length 1517.7
  Top Layer w10: U1.59 3855.4,3090 v1(3860,3090) ; v1(3850,2810) 3855,2815 v1(3855,2905) ; U4.7 4100,2370 4135,2405 v1(4135,2485)
  Bottom Layer w10: v1(3850,2810) 3850,2769.8 3984.8,2635 4151.78,2635 4180,2606.78 4180,2530 v1(4135,2485) ; v1(3855,2905) 3860,2910 v1(3860,3090)
USART1_TX: U1.58 U4.6 | length 1627.7
  Top Layer w10: U1.58 3845.37,3127.87 3857.13,3127.87 v1(3860,3125) ; v1(3885,2810) v1(3885,2900) ; U4.6 4125,2320 4185,2380 v1(4185,2490)
  Bottom Layer w10: v1(3860,3125) 3885,3100 v1(3885,2900) ; v1(3885,2810) 3885,2754.59 3979.59,2660 4170,2660 4215,2615 4215,2535 4182.5,2502.5 v1@4182.5,2492.5
USB_D+: U4.1 U5.A6 U5.B6 | length 442
  Top Layer w10: U4.1 3755,2420 3800.16,2374.84 3800.16,2150.16 ; U5.A6 3800.16,2150.16 ; U5.B6 3839.53,2150.47 3835,2155 3805,2155 3800.16,2150.16
USB_D-: U4.2 U5.A7 U5.B7 | length 397.4
  Top Layer w10: U4.2 3750,2370 3780.47,2339.53 U5.B7 3780.47,2101.42 3791.89,2090 3808.42,2090 U5.A7@3819.84,2101.42 ; U5.A7@3819.84,2106.28 U5.A7
pads on no net: P4.3 P4.4 S1.1 S1.4 S2.3 S2.4 U3.5 U4.4 U5. U5.A8 U5.B8

## Polygon pours and split planes (outlines as drawn)
GND on Top Layer "GND_L01_P008" (solid, remove dead copper, pour order 8): 3125,4080 cw(c3225,4080) 3225,4180 4405,4180 cw(c4405,4080) 4505,4080 4505,1920 cw(c4405,1920) 4405,1820 3225,1820 cw(c3225,1920) 3125,1920
GND on Bottom Layer "GND_L02_P014" (solid, remove dead copper, pour order 14): 4405,4180 cw(c4405,4080) 4505,4080 4505,1920 cw(c4405,1920) 4405,1820 3225,1820 cw(c3225,1920) 3125,1920 3125,4080 cw(c3225,4080) 3225,4180

## Keep-outs
Keep-Out Layer:
  lines w10: 3125,1930.83 ccw(c3235.83,1930.83) 3235.83,1820 3290,1820 4340,1820 4394.17,1820 ccw(c4394.17,1930.83) 4505,1930.83 4505,1985 4505,4015 4505,4069.17 ccw(c4394.17,4069.17) 4394.17,4180 4340,4180 3290,4180 3235.83,4180 ccw(c3235.83,4069.17) 3125,4069.17 3125,4015 3125,1985 3125,1930.83

## Silkscreen, mask and mechanical layers (free items; w line width, h text height)
Top Overlay:
  text "CANL" at 3610,4020 h31.5 r90
  text "CANH" at 4030,4020 h31.5 r90
  text "GND" at 3580,3610 h31.5
  text "SCK" at 3700,3610 h31.5
  text "DIO" at 3825,3610 h31.5
  text "3V3" at 3950,3610 h31.5
Bottom Overlay:
  text "3V3" at 4355,4000 h31.5
  text "C11" at 3345,3995 h31.5
  text "D2" at 3330,3925 h31.5
  text "GND" at 4355,3925 h31.5
  text "A8" at 4355,3830 h31.5
  text "B3" at 3330,3825 h31.5
  text "A9" at 4355,3735 h31.5
  text "B4" at 3330,3730 h31.5
  text "B5" at 3335,3630 h31.5
  text "A10" at 4355,3630 h31.5
  text "C9" at 4360,3530 h31.5
  text "B8(I2C1_SCL)" at 3615,3525 h31.5
  text "B9(I2C1_SDA)" at 3615,3435 h31.5
  text "C8" at 4360,3425 h31.5
  text "C7" at 4360,3330 h31.5
  text "C13" at 3360,3325 h31.5
  text "C6" at 4360,3235 h31.5
  text "C14" at 3360,3230 h31.5
  text "B15" at 4360,3135 h31.5
  text "C15" at 3360,3130 h31.5
  text "B14" at 4360,3035 h31.5
  text "C1" at 3325,3030 h31.5
  text "B13" at 4360,2935 h31.5
  text "A15" at 3370,2930 h31.5
  text "B12" at 4360,2835 h31.5
  text "C3" at 3335,2830 h31.5
  text "B11" at 4360,2735 h31.5
  text "AGND" at 3395,2730 h31.5
  text "A0" at 3335,2635 h31.5
  text "B10" at 4360,2635 h31.5
  text "A1" at 3330,2530 h31.5
  text "B2" at 4360,2530 h31.5
  text "A2" at 3330,2435 h31.5
  text "B1" at 4360,2435 h31.5
  text "A3" at 3330,2330 h31.5
  text "B0" at 4360,2330 h31.5
  text "C5" at 4360,2235 h31.5
  text "A4" at 3330,2230 h31.5
  text "C4" at 4360,2135 h31.5
  text "A5" at 3330,2130 h31.5
  text "A3V3" at 3390,2030 h31.5
  text "A7" at 4360,2030 h31.5
  text "A6" at 4360,1930 h31.5
  text "5V" at 3330,1925 h31.5